# Altium PCB ProPrj_HTXStudio_OneHanded_Keyboard.PcbDoc (part 3 of 11)
Units mm, origin at the board's own origin, x right, y up, seen from the top; angles counter-clockwise.
Board outline 152.4 x 101.6 mm, 20 copper layers (F.Cu, F.Mask, B.Cu, B.Mask, In1.Cu, F.SilkS, In2.Cu, B.SilkS, F.Adhes, B.Adhes, F.Paste, B.Paste, Dwgs.User, Cmts.User, Eco1.User, Eco2.User, Edge.Cuts, Margin, B.CrtYd, F.CrtYd); 269 components, 0 nets, 747 pads, 1168 vias.
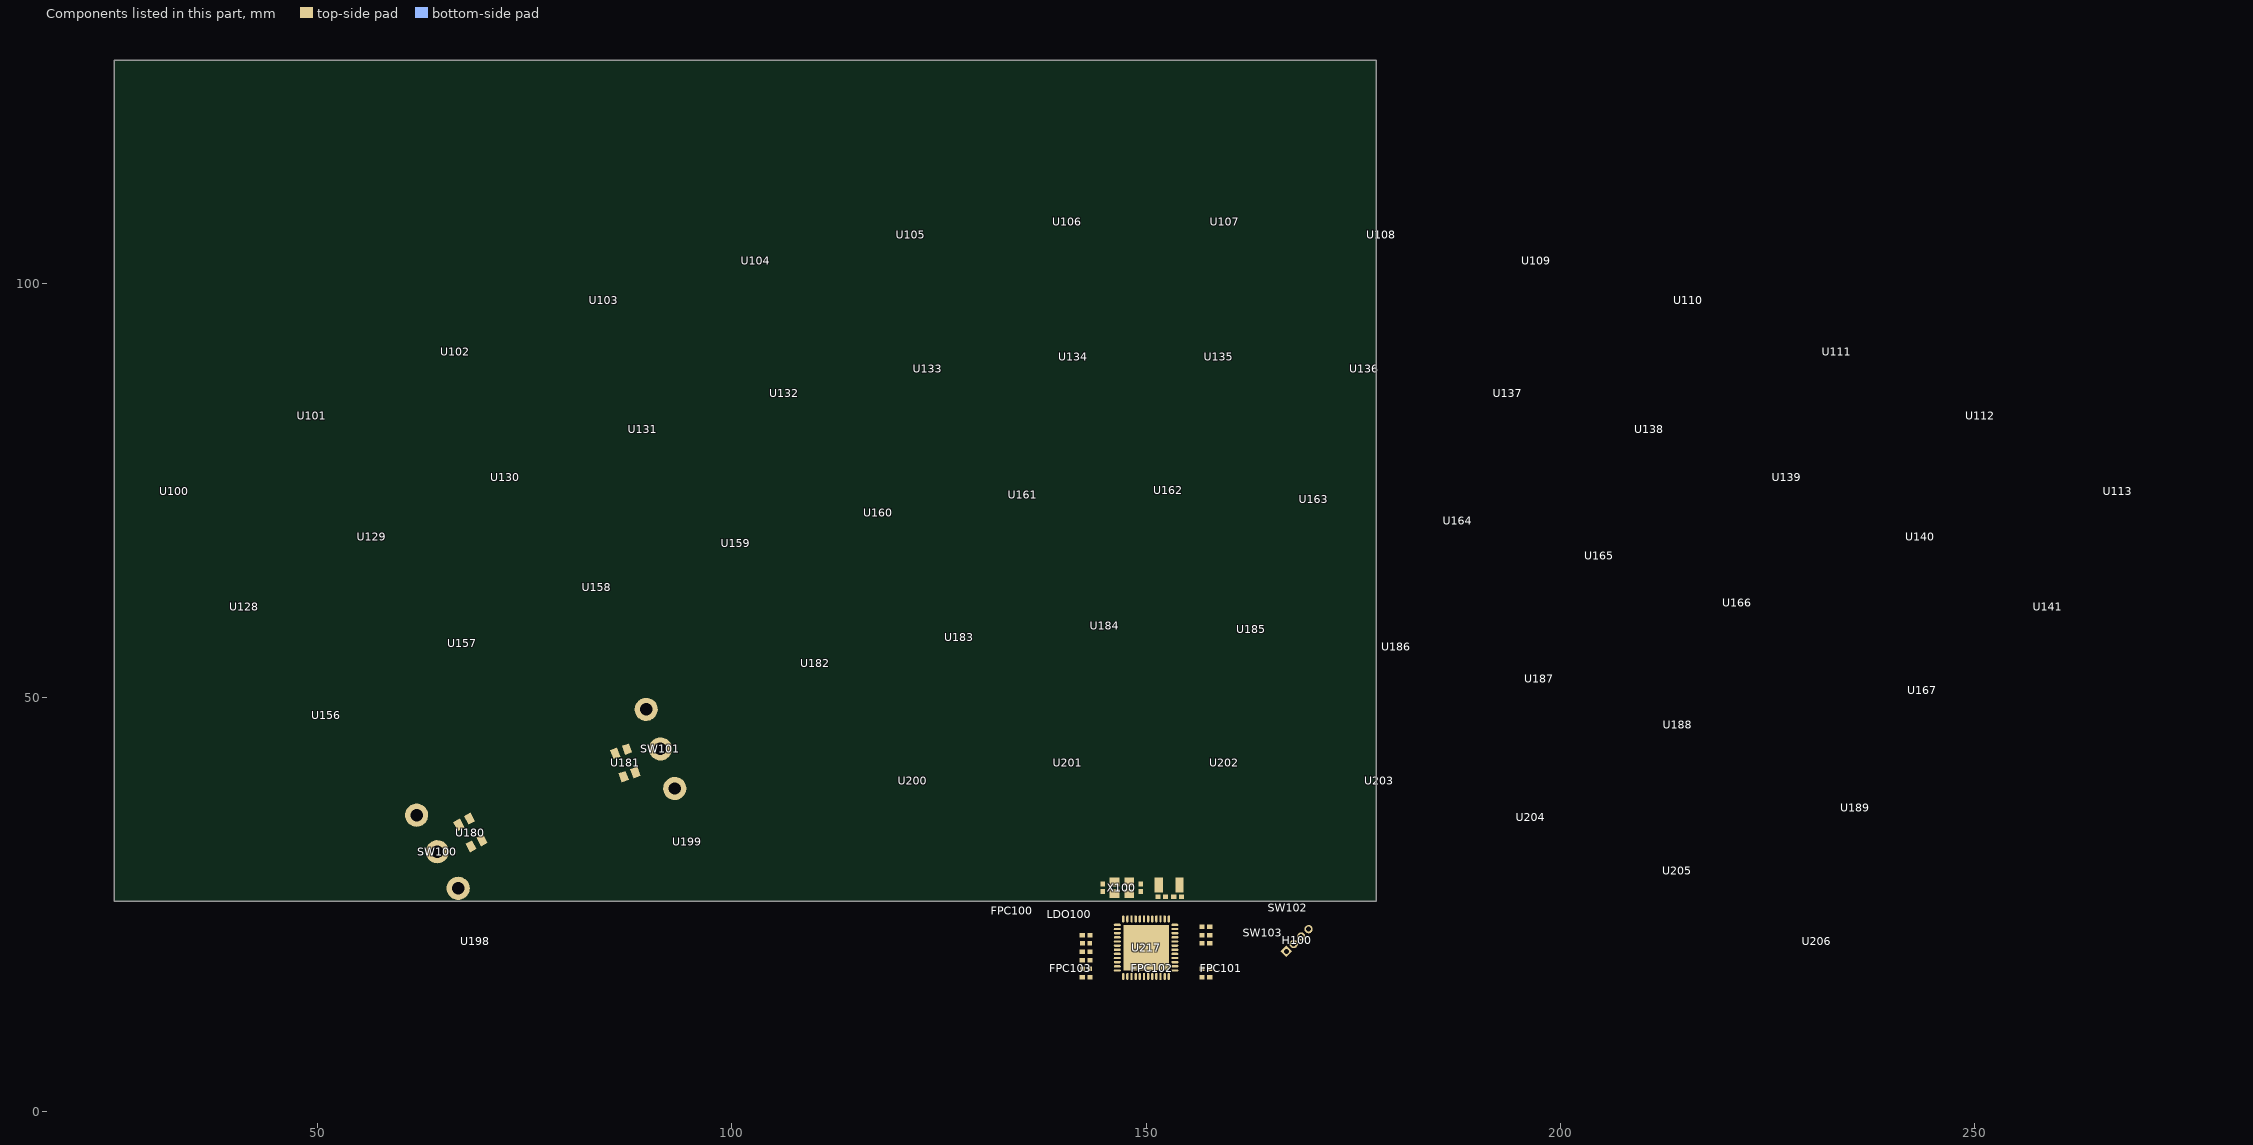
[diagram p15: the components of this part, seen from the top]

## Design rules (kind name [scope] priority, off if disabled: settings) (continued)
PolygonConnect Polygon_B.Cu--226_ConnectRelief90 [IsNamedPolygon('B.Cu--226') vs (IsThruPin or IsSMTPin) and (PadShape_AllLayers <> 'Round')] p396: connectstyle=Relief reliefconductorwidth=0.254 reliefentries=4 polygonreliefangle="90 Angle" airgapwidth=0.254
PolygonConnect Polygon_B.Cu--225_ConnectDirect [IsNamedPolygon('B.Cu--225') vs IsVia] p397: connectstyle=Direct reliefconductorwidth=0.254 reliefentries=4 polygonreliefangle="90 Angle" airgapwidth=0.254
PolygonConnect Polygon_B.Cu--225_ConnectRelief45 [IsNamedPolygon('B.Cu--225') vs (IsThruPin or IsSMTPin) and (PadShape_AllLayers = 'Round')] p398: connectstyle=Relief reliefconductorwidth=0.254 reliefentries=4 polygonreliefangle="45 Angle" airgapwidth=0.254
PolygonConnect Polygon_B.Cu--225_ConnectRelief90 [IsNamedPolygon('B.Cu--225') vs (IsThruPin or IsSMTPin) and (PadShape_AllLayers <> 'Round')] p399: connectstyle=Relief reliefconductorwidth=0.254 reliefentries=4 polygonreliefangle="90 Angle" airgapwidth=0.254
PolygonConnect Polygon_B.Cu--224_ConnectDirect [IsNamedPolygon('B.Cu--224') vs IsVia] p400: connectstyle=Direct reliefconductorwidth=0.254 reliefentries=4 polygonreliefangle="90 Angle" airgapwidth=0.254
PolygonConnect Polygon_B.Cu--224_ConnectRelief45 [IsNamedPolygon('B.Cu--224') vs (IsThruPin or IsSMTPin) and (PadShape_AllLayers = 'Round')] p401: connectstyle=Relief reliefconductorwidth=0.254 reliefentries=4 polygonreliefangle="45 Angle" airgapwidth=0.254
PolygonConnect Polygon_B.Cu--224_ConnectRelief90 [IsNamedPolygon('B.Cu--224') vs (IsThruPin or IsSMTPin) and (PadShape_AllLayers <> 'Round')] p402: connectstyle=Relief reliefconductorwidth=0.254 reliefentries=4 polygonreliefangle="90 Angle" airgapwidth=0.254
PolygonConnect Polygon_B.Cu--223_ConnectDirect [IsNamedPolygon('B.Cu--223') vs IsVia] p403: connectstyle=Direct reliefconductorwidth=0.254 reliefentries=4 polygonreliefangle="90 Angle" airgapwidth=0.254
PolygonConnect Polygon_B.Cu--223_ConnectRelief45 [IsNamedPolygon('B.Cu--223') vs (IsThruPin or IsSMTPin) and (PadShape_AllLayers = 'Round')] p404: connectstyle=Relief reliefconductorwidth=0.254 reliefentries=4 polygonreliefangle="45 Angle" airgapwidth=0.254
PolygonConnect Polygon_B.Cu--223_ConnectRelief90 [IsNamedPolygon('B.Cu--223') vs (IsThruPin or IsSMTPin) and (PadShape_AllLayers <> 'Round')] p405: connectstyle=Relief reliefconductorwidth=0.254 reliefentries=4 polygonreliefangle="90 Angle" airgapwidth=0.254
PolygonConnect Polygon_B.Cu--222_ConnectDirect [IsNamedPolygon('B.Cu--222') vs IsVia] p406: connectstyle=Direct reliefconductorwidth=0.254 reliefentries=4 polygonreliefangle="90 Angle" airgapwidth=0.254
PolygonConnect Polygon_B.Cu--222_ConnectRelief45 [IsNamedPolygon('B.Cu--222') vs (IsThruPin or IsSMTPin) and (PadShape_AllLayers = 'Round')] p407: connectstyle=Relief reliefconductorwidth=0.254 reliefentries=4 polygonreliefangle="45 Angle" airgapwidth=0.254
PolygonConnect Polygon_B.Cu--222_ConnectRelief90 [IsNamedPolygon('B.Cu--222') vs (IsThruPin or IsSMTPin) and (PadShape_AllLayers <> 'Round')] p408: connectstyle=Relief reliefconductorwidth=0.254 reliefentries=4 polygonreliefangle="90 Angle" airgapwidth=0.254
PolygonConnect Polygon_B.Cu--221_ConnectDirect [IsNamedPolygon('B.Cu--221') vs IsVia] p409: connectstyle=Direct reliefconductorwidth=0.254 reliefentries=4 polygonreliefangle="90 Angle" airgapwidth=0.254
PolygonConnect Polygon_B.Cu--221_ConnectRelief45 [IsNamedPolygon('B.Cu--221') vs (IsThruPin or IsSMTPin) and (PadShape_AllLayers = 'Round')] p410: connectstyle=Relief reliefconductorwidth=0.254 reliefentries=4 polygonreliefangle="45 Angle" airgapwidth=0.254
PolygonConnect Polygon_B.Cu--221_ConnectRelief90 [IsNamedPolygon('B.Cu--221') vs (IsThruPin or IsSMTPin) and (PadShape_AllLayers <> 'Round')] p411: connectstyle=Relief reliefconductorwidth=0.254 reliefentries=4 polygonreliefangle="90 Angle" airgapwidth=0.254
PolygonConnect Polygon_B.Cu--220_ConnectDirect [IsNamedPolygon('B.Cu--220') vs IsVia] p412: connectstyle=Direct reliefconductorwidth=0.254 reliefentries=4 polygonreliefangle="90 Angle" airgapwidth=0.254
PolygonConnect Polygon_B.Cu--220_ConnectRelief45 [IsNamedPolygon('B.Cu--220') vs (IsThruPin or IsSMTPin) and (PadShape_AllLayers = 'Round')] p413: connectstyle=Relief reliefconductorwidth=0.254 reliefentries=4 polygonreliefangle="45 Angle" airgapwidth=0.254
PolygonConnect Polygon_B.Cu--220_ConnectRelief90 [IsNamedPolygon('B.Cu--220') vs (IsThruPin or IsSMTPin) and (PadShape_AllLayers <> 'Round')] p414: connectstyle=Relief reliefconductorwidth=0.254 reliefentries=4 polygonreliefangle="90 Angle" airgapwidth=0.254
PolygonConnect Polygon_B.Cu--219_ConnectDirect [IsNamedPolygon('B.Cu--219') vs IsVia] p415: connectstyle=Direct reliefconductorwidth=0.254 reliefentries=4 polygonreliefangle="90 Angle" airgapwidth=0.254
PolygonConnect Polygon_B.Cu--219_ConnectRelief45 [IsNamedPolygon('B.Cu--219') vs (IsThruPin or IsSMTPin) and (PadShape_AllLayers = 'Round')] p416: connectstyle=Relief reliefconductorwidth=0.254 reliefentries=4 polygonreliefangle="45 Angle" airgapwidth=0.254
PolygonConnect Polygon_B.Cu--219_ConnectRelief90 [IsNamedPolygon('B.Cu--219') vs (IsThruPin or IsSMTPin) and (PadShape_AllLayers <> 'Round')] p417: connectstyle=Relief reliefconductorwidth=0.254 reliefentries=4 polygonreliefangle="90 Angle" airgapwidth=0.254
PolygonConnect Polygon_B.Cu--218_ConnectDirect [IsNamedPolygon('B.Cu--218') vs IsVia] p418: connectstyle=Direct reliefconductorwidth=0.254 reliefentries=4 polygonreliefangle="90 Angle" airgapwidth=0.254
PolygonConnect Polygon_B.Cu--218_ConnectRelief45 [IsNamedPolygon('B.Cu--218') vs (IsThruPin or IsSMTPin) and (PadShape_AllLayers = 'Round')] p419: connectstyle=Relief reliefconductorwidth=0.254 reliefentries=4 polygonreliefangle="45 Angle" airgapwidth=0.254
PolygonConnect Polygon_B.Cu--218_ConnectRelief90 [IsNamedPolygon('B.Cu--218') vs (IsThruPin or IsSMTPin) and (PadShape_AllLayers <> 'Round')] p420: connectstyle=Relief reliefconductorwidth=0.254 reliefentries=4 polygonreliefangle="90 Angle" airgapwidth=0.254
PolygonConnect Polygon_B.Cu--217_ConnectDirect [IsNamedPolygon('B.Cu--217') vs IsVia] p421: connectstyle=Direct reliefconductorwidth=0.254 reliefentries=4 polygonreliefangle="90 Angle" airgapwidth=0.254
PolygonConnect Polygon_B.Cu--217_ConnectRelief45 [IsNamedPolygon('B.Cu--217') vs (IsThruPin or IsSMTPin) and (PadShape_AllLayers = 'Round')] p422: connectstyle=Relief reliefconductorwidth=0.254 reliefentries=4 polygonreliefangle="45 Angle" airgapwidth=0.254
PolygonConnect Polygon_B.Cu--217_ConnectRelief90 [IsNamedPolygon('B.Cu--217') vs (IsThruPin or IsSMTPin) and (PadShape_AllLayers <> 'Round')] p423: connectstyle=Relief reliefconductorwidth=0.254 reliefentries=4 polygonreliefangle="90 Angle" airgapwidth=0.254
PolygonConnect Polygon_B.Cu--216_ConnectDirect [IsNamedPolygon('B.Cu--216') vs IsVia] p424: connectstyle=Direct reliefconductorwidth=0.254 reliefentries=4 polygonreliefangle="90 Angle" airgapwidth=0.254
PolygonConnect Polygon_B.Cu--216_ConnectRelief45 [IsNamedPolygon('B.Cu--216') vs (IsThruPin or IsSMTPin) and (PadShape_AllLayers = 'Round')] p425: connectstyle=Relief reliefconductorwidth=0.254 reliefentries=4 polygonreliefangle="45 Angle" airgapwidth=0.254
PolygonConnect Polygon_B.Cu--216_ConnectRelief90 [IsNamedPolygon('B.Cu--216') vs (IsThruPin or IsSMTPin) and (PadShape_AllLayers <> 'Round')] p426: connectstyle=Relief reliefconductorwidth=0.254 reliefentries=4 polygonreliefangle="90 Angle" airgapwidth=0.254
PolygonConnect Polygon_B.Cu--215_ConnectDirect [IsNamedPolygon('B.Cu--215') vs IsVia] p427: connectstyle=Direct reliefconductorwidth=0.254 reliefentries=4 polygonreliefangle="90 Angle" airgapwidth=0.254
PolygonConnect Polygon_B.Cu--215_ConnectRelief45 [IsNamedPolygon('B.Cu--215') vs (IsThruPin or IsSMTPin) and (PadShape_AllLayers = 'Round')] p428: connectstyle=Relief reliefconductorwidth=0.254 reliefentries=4 polygonreliefangle="45 Angle" airgapwidth=0.254
PolygonConnect Polygon_B.Cu--215_ConnectRelief90 [IsNamedPolygon('B.Cu--215') vs (IsThruPin or IsSMTPin) and (PadShape_AllLayers <> 'Round')] p429: connectstyle=Relief reliefconductorwidth=0.254 reliefentries=4 polygonreliefangle="90 Angle" airgapwidth=0.254
PolygonConnect Polygon_B.Cu--214_ConnectDirect [IsNamedPolygon('B.Cu--214') vs IsVia] p430: connectstyle=Direct reliefconductorwidth=0.254 reliefentries=4 polygonreliefangle="90 Angle" airgapwidth=0.254
PolygonConnect Polygon_B.Cu--214_ConnectRelief45 [IsNamedPolygon('B.Cu--214') vs (IsThruPin or IsSMTPin) and (PadShape_AllLayers = 'Round')] p431: connectstyle=Relief reliefconductorwidth=0.254 reliefentries=4 polygonreliefangle="45 Angle" airgapwidth=0.254
PolygonConnect Polygon_B.Cu--214_ConnectRelief90 [IsNamedPolygon('B.Cu--214') vs (IsThruPin or IsSMTPin) and (PadShape_AllLayers <> 'Round')] p432: connectstyle=Relief reliefconductorwidth=0.254 reliefentries=4 polygonreliefangle="90 Angle" airgapwidth=0.254
PolygonConnect Polygon_B.Cu--213_ConnectDirect [IsNamedPolygon('B.Cu--213') vs IsVia] p433: connectstyle=Direct reliefconductorwidth=0.254 reliefentries=4 polygonreliefangle="90 Angle" airgapwidth=0.254
PolygonConnect Polygon_B.Cu--213_ConnectRelief45 [IsNamedPolygon('B.Cu--213') vs (IsThruPin or IsSMTPin) and (PadShape_AllLayers = 'Round')] p434: connectstyle=Relief reliefconductorwidth=0.254 reliefentries=4 polygonreliefangle="45 Angle" airgapwidth=0.254
PolygonConnect Polygon_B.Cu--213_ConnectRelief90 [IsNamedPolygon('B.Cu--213') vs (IsThruPin or IsSMTPin) and (PadShape_AllLayers <> 'Round')] p435: connectstyle=Relief reliefconductorwidth=0.254 reliefentries=4 polygonreliefangle="90 Angle" airgapwidth=0.254
PolygonConnect Polygon_B.Cu--212_ConnectDirect [IsNamedPolygon('B.Cu--212') vs IsVia] p436: connectstyle=Direct reliefconductorwidth=0.254 reliefentries=4 polygonreliefangle="90 Angle" airgapwidth=0.254
PolygonConnect Polygon_B.Cu--212_ConnectRelief45 [IsNamedPolygon('B.Cu--212') vs (IsThruPin or IsSMTPin) and (PadShape_AllLayers = 'Round')] p437: connectstyle=Relief reliefconductorwidth=0.254 reliefentries=4 polygonreliefangle="45 Angle" airgapwidth=0.254
PolygonConnect Polygon_B.Cu--212_ConnectRelief90 [IsNamedPolygon('B.Cu--212') vs (IsThruPin or IsSMTPin) and (PadShape_AllLayers <> 'Round')] p438: connectstyle=Relief reliefconductorwidth=0.254 reliefentries=4 polygonreliefangle="90 Angle" airgapwidth=0.254
PolygonConnect Polygon_B.Cu--211_ConnectDirect [IsNamedPolygon('B.Cu--211') vs IsVia] p439: connectstyle=Direct reliefconductorwidth=0.254 reliefentries=4 polygonreliefangle="90 Angle" airgapwidth=0.254
PolygonConnect Polygon_B.Cu--211_ConnectRelief45 [IsNamedPolygon('B.Cu--211') vs (IsThruPin or IsSMTPin) and (PadShape_AllLayers = 'Round')] p440: connectstyle=Relief reliefconductorwidth=0.254 reliefentries=4 polygonreliefangle="45 Angle" airgapwidth=0.254
PolygonConnect Polygon_B.Cu--211_ConnectRelief90 [IsNamedPolygon('B.Cu--211') vs (IsThruPin or IsSMTPin) and (PadShape_AllLayers <> 'Round')] p441: connectstyle=Relief reliefconductorwidth=0.254 reliefentries=4 polygonreliefangle="90 Angle" airgapwidth=0.254
PolygonConnect Polygon_B.Cu--210_ConnectDirect [IsNamedPolygon('B.Cu--210') vs IsVia] p442: connectstyle=Direct reliefconductorwidth=0.254 reliefentries=4 polygonreliefangle="90 Angle" airgapwidth=0.254
PolygonConnect Polygon_B.Cu--210_ConnectRelief45 [IsNamedPolygon('B.Cu--210') vs (IsThruPin or IsSMTPin) and (PadShape_AllLayers = 'Round')] p443: connectstyle=Relief reliefconductorwidth=0.254 reliefentries=4 polygonreliefangle="45 Angle" airgapwidth=0.254
PolygonConnect Polygon_B.Cu--210_ConnectRelief90 [IsNamedPolygon('B.Cu--210') vs (IsThruPin or IsSMTPin) and (PadShape_AllLayers <> 'Round')] p444: connectstyle=Relief reliefconductorwidth=0.254 reliefentries=4 polygonreliefangle="90 Angle" airgapwidth=0.254
PolygonConnect Polygon_B.Cu--209_ConnectDirect [IsNamedPolygon('B.Cu--209') vs IsVia] p445: connectstyle=Direct reliefconductorwidth=0.254 reliefentries=4 polygonreliefangle="90 Angle" airgapwidth=0.254
PolygonConnect Polygon_B.Cu--209_ConnectRelief45 [IsNamedPolygon('B.Cu--209') vs (IsThruPin or IsSMTPin) and (PadShape_AllLayers = 'Round')] p446: connectstyle=Relief reliefconductorwidth=0.254 reliefentries=4 polygonreliefangle="45 Angle" airgapwidth=0.254
PolygonConnect Polygon_B.Cu--209_ConnectRelief90 [IsNamedPolygon('B.Cu--209') vs (IsThruPin or IsSMTPin) and (PadShape_AllLayers <> 'Round')] p447: connectstyle=Relief reliefconductorwidth=0.254 reliefentries=4 polygonreliefangle="90 Angle" airgapwidth=0.254
PolygonConnect Polygon_B.Cu--208_ConnectDirect [IsNamedPolygon('B.Cu--208') vs IsVia] p448: connectstyle=Direct reliefconductorwidth=0.254 reliefentries=4 polygonreliefangle="90 Angle" airgapwidth=0.254
PolygonConnect Polygon_B.Cu--208_ConnectRelief45 [IsNamedPolygon('B.Cu--208') vs (IsThruPin or IsSMTPin) and (PadShape_AllLayers = 'Round')] p449: connectstyle=Relief reliefconductorwidth=0.254 reliefentries=4 polygonreliefangle="45 Angle" airgapwidth=0.254
PolygonConnect Polygon_B.Cu--208_ConnectRelief90 [IsNamedPolygon('B.Cu--208') vs (IsThruPin or IsSMTPin) and (PadShape_AllLayers <> 'Round')] p450: connectstyle=Relief reliefconductorwidth=0.254 reliefentries=4 polygonreliefangle="90 Angle" airgapwidth=0.254
PolygonConnect Polygon_B.Cu--207_ConnectDirect [IsNamedPolygon('B.Cu--207') vs IsVia] p451: connectstyle=Direct reliefconductorwidth=0.254 reliefentries=4 polygonreliefangle="90 Angle" airgapwidth=0.254
PolygonConnect Polygon_B.Cu--207_ConnectRelief45 [IsNamedPolygon('B.Cu--207') vs (IsThruPin or IsSMTPin) and (PadShape_AllLayers = 'Round')] p452: connectstyle=Relief reliefconductorwidth=0.254 reliefentries=4 polygonreliefangle="45 Angle" airgapwidth=0.254
PolygonConnect Polygon_B.Cu--207_ConnectRelief90 [IsNamedPolygon('B.Cu--207') vs (IsThruPin or IsSMTPin) and (PadShape_AllLayers <> 'Round')] p453: connectstyle=Relief reliefconductorwidth=0.254 reliefentries=4 polygonreliefangle="90 Angle" airgapwidth=0.254
PolygonConnect Polygon_B.Cu--206_ConnectDirect [IsNamedPolygon('B.Cu--206') vs IsVia] p454: connectstyle=Direct reliefconductorwidth=0.254 reliefentries=4 polygonreliefangle="90 Angle" airgapwidth=0.254
PolygonConnect Polygon_B.Cu--206_ConnectRelief45 [IsNamedPolygon('B.Cu--206') vs (IsThruPin or IsSMTPin) and (PadShape_AllLayers = 'Round')] p455: connectstyle=Relief reliefconductorwidth=0.254 reliefentries=4 polygonreliefangle="45 Angle" airgapwidth=0.254
PolygonConnect Polygon_B.Cu--206_ConnectRelief90 [IsNamedPolygon('B.Cu--206') vs (IsThruPin or IsSMTPin) and (PadShape_AllLayers <> 'Round')] p456: connectstyle=Relief reliefconductorwidth=0.254 reliefentries=4 polygonreliefangle="90 Angle" airgapwidth=0.254
PolygonConnect Polygon_B.Cu--205_ConnectDirect [IsNamedPolygon('B.Cu--205') vs IsVia] p457: connectstyle=Direct reliefconductorwidth=0.254 reliefentries=4 polygonreliefangle="90 Angle" airgapwidth=0.254
PolygonConnect Polygon_B.Cu--205_ConnectRelief45 [IsNamedPolygon('B.Cu--205') vs (IsThruPin or IsSMTPin) and (PadShape_AllLayers = 'Round')] p458: connectstyle=Relief reliefconductorwidth=0.254 reliefentries=4 polygonreliefangle="45 Angle" airgapwidth=0.254
PolygonConnect Polygon_B.Cu--205_ConnectRelief90 [IsNamedPolygon('B.Cu--205') vs (IsThruPin or IsSMTPin) and (PadShape_AllLayers <> 'Round')] p459: connectstyle=Relief reliefconductorwidth=0.254 reliefentries=4 polygonreliefangle="90 Angle" airgapwidth=0.254
PolygonConnect Polygon_B.Cu--204_ConnectDirect [IsNamedPolygon('B.Cu--204') vs IsVia] p460: connectstyle=Direct reliefconductorwidth=0.254 reliefentries=4 polygonreliefangle="90 Angle" airgapwidth=0.254
PolygonConnect Polygon_B.Cu--204_ConnectRelief45 [IsNamedPolygon('B.Cu--204') vs (IsThruPin or IsSMTPin) and (PadShape_AllLayers = 'Round')] p461: connectstyle=Relief reliefconductorwidth=0.254 reliefentries=4 polygonreliefangle="45 Angle" airgapwidth=0.254
PolygonConnect Polygon_B.Cu--204_ConnectRelief90 [IsNamedPolygon('B.Cu--204') vs (IsThruPin or IsSMTPin) and (PadShape_AllLayers <> 'Round')] p462: connectstyle=Relief reliefconductorwidth=0.254 reliefentries=4 polygonreliefangle="90 Angle" airgapwidth=0.254
PolygonConnect Polygon_B.Cu--203_ConnectDirect [IsNamedPolygon('B.Cu--203') vs IsVia] p463: connectstyle=Direct reliefconductorwidth=0.254 reliefentries=4 polygonreliefangle="90 Angle" airgapwidth=0.254
PolygonConnect Polygon_B.Cu--203_ConnectRelief45 [IsNamedPolygon('B.Cu--203') vs (IsThruPin or IsSMTPin) and (PadShape_AllLayers = 'Round')] p464: connectstyle=Relief reliefconductorwidth=0.254 reliefentries=4 polygonreliefangle="45 Angle" airgapwidth=0.254
PolygonConnect Polygon_B.Cu--203_ConnectRelief90 [IsNamedPolygon('B.Cu--203') vs (IsThruPin or IsSMTPin) and (PadShape_AllLayers <> 'Round')] p465: connectstyle=Relief reliefconductorwidth=0.254 reliefentries=4 polygonreliefangle="90 Angle" airgapwidth=0.254
PolygonConnect Polygon_B.Cu--202_ConnectDirect [IsNamedPolygon('B.Cu--202') vs IsVia] p466: connectstyle=Direct reliefconductorwidth=0.254 reliefentries=4 polygonreliefangle="90 Angle" airgapwidth=0.254
PolygonConnect Polygon_B.Cu--202_ConnectRelief45 [IsNamedPolygon('B.Cu--202') vs (IsThruPin or IsSMTPin) and (PadShape_AllLayers = 'Round')] p467: connectstyle=Relief reliefconductorwidth=0.254 reliefentries=4 polygonreliefangle="45 Angle" airgapwidth=0.254
PolygonConnect Polygon_B.Cu--202_ConnectRelief90 [IsNamedPolygon('B.Cu--202') vs (IsThruPin or IsSMTPin) and (PadShape_AllLayers <> 'Round')] p468: connectstyle=Relief reliefconductorwidth=0.254 reliefentries=4 polygonreliefangle="90 Angle" airgapwidth=0.254
PolygonConnect Polygon_B.Cu--201_ConnectDirect [IsNamedPolygon('B.Cu--201') vs IsVia] p469: connectstyle=Direct reliefconductorwidth=0.254 reliefentries=4 polygonreliefangle="90 Angle" airgapwidth=0.254
PolygonConnect Polygon_B.Cu--201_ConnectRelief45 [IsNamedPolygon('B.Cu--201') vs (IsThruPin or IsSMTPin) and (PadShape_AllLayers = 'Round')] p470: connectstyle=Relief reliefconductorwidth=0.254 reliefentries=4 polygonreliefangle="45 Angle" airgapwidth=0.254
PolygonConnect Polygon_B.Cu--201_ConnectRelief90 [IsNamedPolygon('B.Cu--201') vs (IsThruPin or IsSMTPin) and (PadShape_AllLayers <> 'Round')] p471: connectstyle=Relief reliefconductorwidth=0.254 reliefentries=4 polygonreliefangle="90 Angle" airgapwidth=0.254
PolygonConnect Polygon_B.Cu--200_ConnectDirect [IsNamedPolygon('B.Cu--200') vs IsVia] p472: connectstyle=Direct reliefconductorwidth=0.254 reliefentries=4 polygonreliefangle="90 Angle" airgapwidth=0.254
PolygonConnect Polygon_B.Cu--200_ConnectRelief45 [IsNamedPolygon('B.Cu--200') vs (IsThruPin or IsSMTPin) and (PadShape_AllLayers = 'Round')] p473: connectstyle=Relief reliefconductorwidth=0.254 reliefentries=4 polygonreliefangle="45 Angle" airgapwidth=0.254
PolygonConnect Polygon_B.Cu--200_ConnectRelief90 [IsNamedPolygon('B.Cu--200') vs (IsThruPin or IsSMTPin) and (PadShape_AllLayers <> 'Round')] p474: connectstyle=Relief reliefconductorwidth=0.254 reliefentries=4 polygonreliefangle="90 Angle" airgapwidth=0.254
PolygonConnect Polygon_B.Cu--199_ConnectDirect [IsNamedPolygon('B.Cu--199') vs IsVia] p475: connectstyle=Direct reliefconductorwidth=0.254 reliefentries=4 polygonreliefangle="90 Angle" airgapwidth=0.254
PolygonConnect Polygon_B.Cu--199_ConnectRelief45 [IsNamedPolygon('B.Cu--199') vs (IsThruPin or IsSMTPin) and (PadShape_AllLayers = 'Round')] p476: connectstyle=Relief reliefconductorwidth=0.254 reliefentries=4 polygonreliefangle="45 Angle" airgapwidth=0.254
PolygonConnect Polygon_B.Cu--199_ConnectRelief90 [IsNamedPolygon('B.Cu--199') vs (IsThruPin or IsSMTPin) and (PadShape_AllLayers <> 'Round')] p477: connectstyle=Relief reliefconductorwidth=0.254 reliefentries=4 polygonreliefangle="90 Angle" airgapwidth=0.254
PolygonConnect Polygon_B.Cu--198_ConnectDirect [IsNamedPolygon('B.Cu--198') vs IsVia] p478: connectstyle=Direct reliefconductorwidth=0.254 reliefentries=4 polygonreliefangle="90 Angle" airgapwidth=0.254
PolygonConnect Polygon_B.Cu--198_ConnectRelief45 [IsNamedPolygon('B.Cu--198') vs (IsThruPin or IsSMTPin) and (PadShape_AllLayers = 'Round')] p479: connectstyle=Relief reliefconductorwidth=0.254 reliefentries=4 polygonreliefangle="45 Angle" airgapwidth=0.254
PolygonConnect Polygon_B.Cu--198_ConnectRelief90 [IsNamedPolygon('B.Cu--198') vs (IsThruPin or IsSMTPin) and (PadShape_AllLayers <> 'Round')] p480: connectstyle=Relief reliefconductorwidth=0.254 reliefentries=4 polygonreliefangle="90 Angle" airgapwidth=0.254
PolygonConnect Polygon_B.Cu--197_ConnectDirect [IsNamedPolygon('B.Cu--197') vs IsVia] p481: connectstyle=Direct reliefconductorwidth=0.254 reliefentries=4 polygonreliefangle="90 Angle" airgapwidth=0.254
PolygonConnect Polygon_B.Cu--197_ConnectRelief45 [IsNamedPolygon('B.Cu--197') vs (IsThruPin or IsSMTPin) and (PadShape_AllLayers = 'Round')] p482: connectstyle=Relief reliefconductorwidth=0.254 reliefentries=4 polygonreliefangle="45 Angle" airgapwidth=0.254
PolygonConnect Polygon_B.Cu--197_ConnectRelief90 [IsNamedPolygon('B.Cu--197') vs (IsThruPin or IsSMTPin) and (PadShape_AllLayers <> 'Round')] p483: connectstyle=Relief reliefconductorwidth=0.254 reliefentries=4 polygonreliefangle="90 Angle" airgapwidth=0.254
PolygonConnect Polygon_B.Cu--196_ConnectDirect [IsNamedPolygon('B.Cu--196') vs IsVia] p484: connectstyle=Direct reliefconductorwidth=0.254 reliefentries=4 polygonreliefangle="90 Angle" airgapwidth=0.254
PolygonConnect Polygon_B.Cu--196_ConnectRelief45 [IsNamedPolygon('B.Cu--196') vs (IsThruPin or IsSMTPin) and (PadShape_AllLayers = 'Round')] p485: connectstyle=Relief reliefconductorwidth=0.254 reliefentries=4 polygonreliefangle="45 Angle" airgapwidth=0.254
PolygonConnect Polygon_B.Cu--196_ConnectRelief90 [IsNamedPolygon('B.Cu--196') vs (IsThruPin or IsSMTPin) and (PadShape_AllLayers <> 'Round')] p486: connectstyle=Relief reliefconductorwidth=0.254 reliefentries=4 polygonreliefangle="90 Angle" airgapwidth=0.254
PolygonConnect Polygon_B.Cu--195_ConnectDirect [IsNamedPolygon('B.Cu--195') vs IsVia] p487: connectstyle=Direct reliefconductorwidth=0.254 reliefentries=4 polygonreliefangle="90 Angle" airgapwidth=0.254
PolygonConnect Polygon_B.Cu--195_ConnectRelief45 [IsNamedPolygon('B.Cu--195') vs (IsThruPin or IsSMTPin) and (PadShape_AllLayers = 'Round')] p488: connectstyle=Relief reliefconductorwidth=0.254 reliefentries=4 polygonreliefangle="45 Angle" airgapwidth=0.254
PolygonConnect Polygon_B.Cu--195_ConnectRelief90 [IsNamedPolygon('B.Cu--195') vs (IsThruPin or IsSMTPin) and (PadShape_AllLayers <> 'Round')] p489: connectstyle=Relief reliefconductorwidth=0.254 reliefentries=4 polygonreliefangle="90 Angle" airgapwidth=0.254
PolygonConnect Polygon_B.Cu--194_ConnectDirect [IsNamedPolygon('B.Cu--194') vs IsVia] p490: connectstyle=Direct reliefconductorwidth=0.254 reliefentries=4 polygonreliefangle="90 Angle" airgapwidth=0.254
PolygonConnect Polygon_B.Cu--194_ConnectRelief45 [IsNamedPolygon('B.Cu--194') vs (IsThruPin or IsSMTPin) and (PadShape_AllLayers = 'Round')] p491: connectstyle=Relief reliefconductorwidth=0.254 reliefentries=4 polygonreliefangle="45 Angle" airgapwidth=0.254
PolygonConnect Polygon_B.Cu--194_ConnectRelief90 [IsNamedPolygon('B.Cu--194') vs (IsThruPin or IsSMTPin) and (PadShape_AllLayers <> 'Round')] p492: connectstyle=Relief reliefconductorwidth=0.254 reliefentries=4 polygonreliefangle="90 Angle" airgapwidth=0.254
PolygonConnect Polygon_B.Cu--193_ConnectDirect [IsNamedPolygon('B.Cu--193') vs IsVia] p493: connectstyle=Direct reliefconductorwidth=0.254 reliefentries=4 polygonreliefangle="90 Angle" airgapwidth=0.254
PolygonConnect Polygon_B.Cu--193_ConnectRelief45 [IsNamedPolygon('B.Cu--193') vs (IsThruPin or IsSMTPin) and (PadShape_AllLayers = 'Round')] p494: connectstyle=Relief reliefconductorwidth=0.254 reliefentries=4 polygonreliefangle="45 Angle" airgapwidth=0.254
PolygonConnect Polygon_B.Cu--193_ConnectRelief90 [IsNamedPolygon('B.Cu--193') vs (IsThruPin or IsSMTPin) and (PadShape_AllLayers <> 'Round')] p495: connectstyle=Relief reliefconductorwidth=0.254 reliefentries=4 polygonreliefangle="90 Angle" airgapwidth=0.254
PolygonConnect Polygon_B.Cu--192_ConnectDirect [IsNamedPolygon('B.Cu--192') vs IsVia] p496: connectstyle=Direct reliefconductorwidth=0.254 reliefentries=4 polygonreliefangle="90 Angle" airgapwidth=0.254
PolygonConnect Polygon_B.Cu--192_ConnectRelief45 [IsNamedPolygon('B.Cu--192') vs (IsThruPin or IsSMTPin) and (PadShape_AllLayers = 'Round')] p497: connectstyle=Relief reliefconductorwidth=0.254 reliefentries=4 polygonreliefangle="45 Angle" airgapwidth=0.254
PolygonConnect Polygon_B.Cu--192_ConnectRelief90 [IsNamedPolygon('B.Cu--192') vs (IsThruPin or IsSMTPin) and (PadShape_AllLayers <> 'Round')] p498: connectstyle=Relief reliefconductorwidth=0.254 reliefentries=4 polygonreliefangle="90 Angle" airgapwidth=0.254
PolygonConnect Polygon_B.Cu--191_ConnectDirect [IsNamedPolygon('B.Cu--191') vs IsVia] p499: connectstyle=Direct reliefconductorwidth=0.254 reliefentries=4 polygonreliefangle="90 Angle" airgapwidth=0.254
PolygonConnect Polygon_B.Cu--191_ConnectRelief45 [IsNamedPolygon('B.Cu--191') vs (IsThruPin or IsSMTPin) and (PadShape_AllLayers = 'Round')] p500: connectstyle=Relief reliefconductorwidth=0.254 reliefentries=4 polygonreliefangle="45 Angle" airgapwidth=0.254
PolygonConnect Polygon_B.Cu--191_ConnectRelief90 [IsNamedPolygon('B.Cu--191') vs (IsThruPin or IsSMTPin) and (PadShape_AllLayers <> 'Round')] p501: connectstyle=Relief reliefconductorwidth=0.254 reliefentries=4 polygonreliefangle="90 Angle" airgapwidth=0.254
PolygonConnect Polygon_B.Cu--190_ConnectDirect [IsNamedPolygon('B.Cu--190') vs IsVia] p502: connectstyle=Direct reliefconductorwidth=0.254 reliefentries=4 polygonreliefangle="90 Angle" airgapwidth=0.254
PolygonConnect Polygon_B.Cu--190_ConnectRelief45 [IsNamedPolygon('B.Cu--190') vs (IsThruPin or IsSMTPin) and (PadShape_AllLayers = 'Round')] p503: connectstyle=Relief reliefconductorwidth=0.254 reliefentries=4 polygonreliefangle="45 Angle" airgapwidth=0.254
PolygonConnect Polygon_B.Cu--190_ConnectRelief90 [IsNamedPolygon('B.Cu--190') vs (IsThruPin or IsSMTPin) and (PadShape_AllLayers <> 'Round')] p504: connectstyle=Relief reliefconductorwidth=0.254 reliefentries=4 polygonreliefangle="90 Angle" airgapwidth=0.254
PolygonConnect Polygon_B.Cu--189_ConnectDirect [IsNamedPolygon('B.Cu--189') vs IsVia] p505: connectstyle=Direct reliefconductorwidth=0.254 reliefentries=4 polygonreliefangle="90 Angle" airgapwidth=0.254
PolygonConnect Polygon_B.Cu--189_ConnectRelief45 [IsNamedPolygon('B.Cu--189') vs (IsThruPin or IsSMTPin) and (PadShape_AllLayers = 'Round')] p506: connectstyle=Relief reliefconductorwidth=0.254 reliefentries=4 polygonreliefangle="45 Angle" airgapwidth=0.254
PolygonConnect Polygon_B.Cu--189_ConnectRelief90 [IsNamedPolygon('B.Cu--189') vs (IsThruPin or IsSMTPin) and (PadShape_AllLayers <> 'Round')] p507: connectstyle=Relief reliefconductorwidth=0.254 reliefentries=4 polygonreliefangle="90 Angle" airgapwidth=0.254
PolygonConnect Polygon_B.Cu--188_ConnectDirect [IsNamedPolygon('B.Cu--188') vs IsVia] p508: connectstyle=Direct reliefconductorwidth=0.254 reliefentries=4 polygonreliefangle="90 Angle" airgapwidth=0.254
PolygonConnect Polygon_B.Cu--188_ConnectRelief45 [IsNamedPolygon('B.Cu--188') vs (IsThruPin or IsSMTPin) and (PadShape_AllLayers = 'Round')] p509: connectstyle=Relief reliefconductorwidth=0.254 reliefentries=4 polygonreliefangle="45 Angle" airgapwidth=0.254
PolygonConnect Polygon_B.Cu--188_ConnectRelief90 [IsNamedPolygon('B.Cu--188') vs (IsThruPin or IsSMTPin) and (PadShape_AllLayers <> 'Round')] p510: connectstyle=Relief reliefconductorwidth=0.254 reliefentries=4 polygonreliefangle="90 Angle" airgapwidth=0.254
PolygonConnect Polygon_B.Cu--187_ConnectDirect [IsNamedPolygon('B.Cu--187') vs IsVia] p511: connectstyle=Direct reliefconductorwidth=0.254 reliefentries=4 polygonreliefangle="90 Angle" airgapwidth=0.254
PolygonConnect Polygon_B.Cu--187_ConnectRelief45 [IsNamedPolygon('B.Cu--187') vs (IsThruPin or IsSMTPin) and (PadShape_AllLayers = 'Round')] p512: connectstyle=Relief reliefconductorwidth=0.254 reliefentries=4 polygonreliefangle="45 Angle" airgapwidth=0.254
PolygonConnect Polygon_B.Cu--187_ConnectRelief90 [IsNamedPolygon('B.Cu--187') vs (IsThruPin or IsSMTPin) and (PadShape_AllLayers <> 'Round')] p513: connectstyle=Relief reliefconductorwidth=0.254 reliefentries=4 polygonreliefangle="90 Angle" airgapwidth=0.254
PolygonConnect Polygon_B.Cu--186_ConnectDirect [IsNamedPolygon('B.Cu--186') vs IsVia] p514: connectstyle=Direct reliefconductorwidth=0.254 reliefentries=4 polygonreliefangle="90 Angle" airgapwidth=0.254
PolygonConnect Polygon_B.Cu--186_ConnectRelief45 [IsNamedPolygon('B.Cu--186') vs (IsThruPin or IsSMTPin) and (PadShape_AllLayers = 'Round')] p515: connectstyle=Relief reliefconductorwidth=0.254 reliefentries=4 polygonreliefangle="45 Angle" airgapwidth=0.254
PolygonConnect Polygon_B.Cu--186_ConnectRelief90 [IsNamedPolygon('B.Cu--186') vs (IsThruPin or IsSMTPin) and (PadShape_AllLayers <> 'Round')] p516: connectstyle=Relief reliefconductorwidth=0.254 reliefentries=4 polygonreliefangle="90 Angle" airgapwidth=0.254
PolygonConnect Polygon_B.Cu--185_ConnectDirect [IsNamedPolygon('B.Cu--185') vs IsVia] p517: connectstyle=Direct reliefconductorwidth=0.254 reliefentries=4 polygonreliefangle="90 Angle" airgapwidth=0.254
PolygonConnect Polygon_B.Cu--185_ConnectRelief45 [IsNamedPolygon('B.Cu--185') vs (IsThruPin or IsSMTPin) and (PadShape_AllLayers = 'Round')] p518: connectstyle=Relief reliefconductorwidth=0.254 reliefentries=4 polygonreliefangle="45 Angle" airgapwidth=0.254
PolygonConnect Polygon_B.Cu--185_ConnectRelief90 [IsNamedPolygon('B.Cu--185') vs (IsThruPin or IsSMTPin) and (PadShape_AllLayers <> 'Round')] p519: connectstyle=Relief reliefconductorwidth=0.254 reliefentries=4 polygonreliefangle="90 Angle" airgapwidth=0.254
PolygonConnect Polygon_B.Cu--184_ConnectDirect [IsNamedPolygon('B.Cu--184') vs IsVia] p520: connectstyle=Direct reliefconductorwidth=0.254 reliefentries=4 polygonreliefangle="90 Angle" airgapwidth=0.254
PolygonConnect Polygon_B.Cu--184_ConnectRelief45 [IsNamedPolygon('B.Cu--184') vs (IsThruPin or IsSMTPin) and (PadShape_AllLayers = 'Round')] p521: connectstyle=Relief reliefconductorwidth=0.254 reliefentries=4 polygonreliefangle="45 Angle" airgapwidth=0.254
PolygonConnect Polygon_B.Cu--184_ConnectRelief90 [IsNamedPolygon('B.Cu--184') vs (IsThruPin or IsSMTPin) and (PadShape_AllLayers <> 'Round')] p522: connectstyle=Relief reliefconductorwidth=0.254 reliefentries=4 polygonreliefangle="90 Angle" airgapwidth=0.254
PolygonConnect Polygon_B.Cu--183_ConnectDirect [IsNamedPolygon('B.Cu--183') vs IsVia] p523: connectstyle=Direct reliefconductorwidth=0.254 reliefentries=4 polygonreliefangle="90 Angle" airgapwidth=0.254
PolygonConnect Polygon_B.Cu--183_ConnectRelief45 [IsNamedPolygon('B.Cu--183') vs (IsThruPin or IsSMTPin) and (PadShape_AllLayers = 'Round')] p524: connectstyle=Relief reliefconductorwidth=0.254 reliefentries=4 polygonreliefangle="45 Angle" airgapwidth=0.254
PolygonConnect Polygon_B.Cu--183_ConnectRelief90 [IsNamedPolygon('B.Cu--183') vs (IsThruPin or IsSMTPin) and (PadShape_AllLayers <> 'Round')] p525: connectstyle=Relief reliefconductorwidth=0.254 reliefentries=4 polygonreliefangle="90 Angle" airgapwidth=0.254
PolygonConnect Polygon_B.Cu--182_ConnectDirect [IsNamedPolygon('B.Cu--182') vs IsVia] p526: connectstyle=Direct reliefconductorwidth=0.254 reliefentries=4 polygonreliefangle="90 Angle" airgapwidth=0.254
PolygonConnect Polygon_B.Cu--182_ConnectRelief45 [IsNamedPolygon('B.Cu--182') vs (IsThruPin or IsSMTPin) and (PadShape_AllLayers = 'Round')] p527: connectstyle=Relief reliefconductorwidth=0.254 reliefentries=4 polygonreliefangle="45 Angle" airgapwidth=0.254
PolygonConnect Polygon_B.Cu--182_ConnectRelief90 [IsNamedPolygon('B.Cu--182') vs (IsThruPin or IsSMTPin) and (PadShape_AllLayers <> 'Round')] p528: connectstyle=Relief reliefconductorwidth=0.254 reliefentries=4 polygonreliefangle="90 Angle" airgapwidth=0.254
PolygonConnect Polygon_B.Cu--181_ConnectDirect [IsNamedPolygon('B.Cu--181') vs IsVia] p529: connectstyle=Direct reliefconductorwidth=0.254 reliefentries=4 polygonreliefangle="90 Angle" airgapwidth=0.254
PolygonConnect Polygon_B.Cu--181_ConnectRelief45 [IsNamedPolygon('B.Cu--181') vs (IsThruPin or IsSMTPin) and (PadShape_AllLayers = 'Round')] p530: connectstyle=Relief reliefconductorwidth=0.254 reliefentries=4 polygonreliefangle="45 Angle" airgapwidth=0.254
PolygonConnect Polygon_B.Cu--181_ConnectRelief90 [IsNamedPolygon('B.Cu--181') vs (IsThruPin or IsSMTPin) and (PadShape_AllLayers <> 'Round')] p531: connectstyle=Relief reliefconductorwidth=0.254 reliefentries=4 polygonreliefangle="90 Angle" airgapwidth=0.254
PolygonConnect Polygon_B.Cu--180_ConnectDirect [IsNamedPolygon('B.Cu--180') vs IsVia] p532: connectstyle=Direct reliefconductorwidth=0.254 reliefentries=4 polygonreliefangle="90 Angle" airgapwidth=0.254
PolygonConnect Polygon_B.Cu--180_ConnectRelief45 [IsNamedPolygon('B.Cu--180') vs (IsThruPin or IsSMTPin) and (PadShape_AllLayers = 'Round')] p533: connectstyle=Relief reliefconductorwidth=0.254 reliefentries=4 polygonreliefangle="45 Angle" airgapwidth=0.254
PolygonConnect Polygon_B.Cu--180_ConnectRelief90 [IsNamedPolygon('B.Cu--180') vs (IsThruPin or IsSMTPin) and (PadShape_AllLayers <> 'Round')] p534: connectstyle=Relief reliefconductorwidth=0.254 reliefentries=4 polygonreliefangle="90 Angle" airgapwidth=0.254
PolygonConnect Polygon_B.Cu--179_ConnectDirect [IsNamedPolygon('B.Cu--179') vs IsVia] p535: connectstyle=Direct reliefconductorwidth=0.254 reliefentries=4 polygonreliefangle="90 Angle" airgapwidth=0.254
PolygonConnect Polygon_B.Cu--179_ConnectRelief45 [IsNamedPolygon('B.Cu--179') vs (IsThruPin or IsSMTPin) and (PadShape_AllLayers = 'Round')] p536: connectstyle=Relief reliefconductorwidth=0.254 reliefentries=4 polygonreliefangle="45 Angle" airgapwidth=0.254
PolygonConnect Polygon_B.Cu--179_ConnectRelief90 [IsNamedPolygon('B.Cu--179') vs (IsThruPin or IsSMTPin) and (PadShape_AllLayers <> 'Round')] p537: connectstyle=Relief reliefconductorwidth=0.254 reliefentries=4 polygonreliefangle="90 Angle" airgapwidth=0.254
PolygonConnect Polygon_B.Cu--178_ConnectDirect [IsNamedPolygon('B.Cu--178') vs IsVia] p538: connectstyle=Direct reliefconductorwidth=0.254 reliefentries=4 polygonreliefangle="90 Angle" airgapwidth=0.254
PolygonConnect Polygon_B.Cu--178_ConnectRelief45 [IsNamedPolygon('B.Cu--178') vs (IsThruPin or IsSMTPin) and (PadShape_AllLayers = 'Round')] p539: connectstyle=Relief reliefconductorwidth=0.254 reliefentries=4 polygonreliefangle="45 Angle" airgapwidth=0.254
PolygonConnect Polygon_B.Cu--178_ConnectRelief90 [IsNamedPolygon('B.Cu--178') vs (IsThruPin or IsSMTPin) and (PadShape_AllLayers <> 'Round')] p540: connectstyle=Relief reliefconductorwidth=0.254 reliefentries=4 polygonreliefangle="90 Angle" airgapwidth=0.254
PolygonConnect Polygon_B.Cu--177_ConnectDirect [IsNamedPolygon('B.Cu--177') vs IsVia] p541: connectstyle=Direct reliefconductorwidth=0.254 reliefentries=4 polygonreliefangle="90 Angle" airgapwidth=0.254
PolygonConnect Polygon_B.Cu--177_ConnectRelief45 [IsNamedPolygon('B.Cu--177') vs (IsThruPin or IsSMTPin) and (PadShape_AllLayers = 'Round')] p542: connectstyle=Relief reliefconductorwidth=0.254 reliefentries=4 polygonreliefangle="45 Angle" airgapwidth=0.254
PolygonConnect Polygon_B.Cu--177_ConnectRelief90 [IsNamedPolygon('B.Cu--177') vs (IsThruPin or IsSMTPin) and (PadShape_AllLayers <> 'Round')] p543: connectstyle=Relief reliefconductorwidth=0.254 reliefentries=4 polygonreliefangle="90 Angle" airgapwidth=0.254
PolygonConnect Polygon_B.Cu--176_ConnectDirect [IsNamedPolygon('B.Cu--176') vs IsVia] p544: connectstyle=Direct reliefconductorwidth=0.254 reliefentries=4 polygonreliefangle="90 Angle" airgapwidth=0.254
PolygonConnect Polygon_B.Cu--176_ConnectRelief45 [IsNamedPolygon('B.Cu--176') vs (IsThruPin or IsSMTPin) and (PadShape_AllLayers = 'Round')] p545: connectstyle=Relief reliefconductorwidth=0.254 reliefentries=4 polygonreliefangle="45 Angle" airgapwidth=0.254
PolygonConnect Polygon_B.Cu--176_ConnectRelief90 [IsNamedPolygon('B.Cu--176') vs (IsThruPin or IsSMTPin) and (PadShape_AllLayers <> 'Round')] p546: connectstyle=Relief reliefconductorwidth=0.254 reliefentries=4 polygonreliefangle="90 Angle" airgapwidth=0.254
PolygonConnect Polygon_B.Cu--175_ConnectDirect [IsNamedPolygon('B.Cu--175') vs IsVia] p547: connectstyle=Direct reliefconductorwidth=0.254 reliefentries=4 polygonreliefangle="90 Angle" airgapwidth=0.254
PolygonConnect Polygon_B.Cu--175_ConnectRelief45 [IsNamedPolygon('B.Cu--175') vs (IsThruPin or IsSMTPin) and (PadShape_AllLayers = 'Round')] p548: connectstyle=Relief reliefconductorwidth=0.254 reliefentries=4 polygonreliefangle="45 Angle" airgapwidth=0.254
PolygonConnect Polygon_B.Cu--175_ConnectRelief90 [IsNamedPolygon('B.Cu--175') vs (IsThruPin or IsSMTPin) and (PadShape_AllLayers <> 'Round')] p549: connectstyle=Relief reliefconductorwidth=0.254 reliefentries=4 polygonreliefangle="90 Angle" airgapwidth=0.254
PolygonConnect Polygon_B.Cu--174_ConnectDirect [IsNamedPolygon('B.Cu--174') vs IsVia] p550: connectstyle=Direct reliefconductorwidth=0.254 reliefentries=4 polygonreliefangle="90 Angle" airgapwidth=0.254
PolygonConnect Polygon_B.Cu--174_ConnectRelief45 [IsNamedPolygon('B.Cu--174') vs (IsThruPin or IsSMTPin) and (PadShape_AllLayers = 'Round')] p551: connectstyle=Relief reliefconductorwidth=0.254 reliefentries=4 polygonreliefangle="45 Angle" airgapwidth=0.254
PolygonConnect Polygon_B.Cu--174_ConnectRelief90 [IsNamedPolygon('B.Cu--174') vs (IsThruPin or IsSMTPin) and (PadShape_AllLayers <> 'Round')] p552: connectstyle=Relief reliefconductorwidth=0.254 reliefentries=4 polygonreliefangle="90 Angle" airgapwidth=0.254
PolygonConnect Polygon_B.Cu--173_ConnectDirect [IsNamedPolygon('B.Cu--173') vs IsVia] p553: connectstyle=Direct reliefconductorwidth=0.254 reliefentries=4 polygonreliefangle="90 Angle" airgapwidth=0.254
PolygonConnect Polygon_B.Cu--173_ConnectRelief45 [IsNamedPolygon('B.Cu--173') vs (IsThruPin or IsSMTPin) and (PadShape_AllLayers = 'Round')] p554: connectstyle=Relief reliefconductorwidth=0.254 reliefentries=4 polygonreliefangle="45 Angle" airgapwidth=0.254
PolygonConnect Polygon_B.Cu--173_ConnectRelief90 [IsNamedPolygon('B.Cu--173') vs (IsThruPin or IsSMTPin) and (PadShape_AllLayers <> 'Round')] p555: connectstyle=Relief reliefconductorwidth=0.254 reliefentries=4 polygonreliefangle="90 Angle" airgapwidth=0.254
PolygonConnect Polygon_B.Cu--172_ConnectDirect [IsNamedPolygon('B.Cu--172') vs IsVia] p556: connectstyle=Direct reliefconductorwidth=0.254 reliefentries=4 polygonreliefangle="90 Angle" airgapwidth=0.254
PolygonConnect Polygon_B.Cu--172_ConnectRelief45 [IsNamedPolygon('B.Cu--172') vs (IsThruPin or IsSMTPin) and (PadShape_AllLayers = 'Round')] p557: connectstyle=Relief reliefconductorwidth=0.254 reliefentries=4 polygonreliefangle="45 Angle" airgapwidth=0.254
PolygonConnect Polygon_B.Cu--172_ConnectRelief90 [IsNamedPolygon('B.Cu--172') vs (IsThruPin or IsSMTPin) and (PadShape_AllLayers <> 'Round')] p558: connectstyle=Relief reliefconductorwidth=0.254 reliefentries=4 polygonreliefangle="90 Angle" airgapwidth=0.254
PolygonConnect Polygon_B.Cu--171_ConnectDirect [IsNamedPolygon('B.Cu--171') vs IsVia] p559: connectstyle=Direct reliefconductorwidth=0.254 reliefentries=4 polygonreliefangle="90 Angle" airgapwidth=0.254
PolygonConnect Polygon_B.Cu--171_ConnectRelief45 [IsNamedPolygon('B.Cu--171') vs (IsThruPin or IsSMTPin) and (PadShape_AllLayers = 'Round')] p560: connectstyle=Relief reliefconductorwidth=0.254 reliefentries=4 polygonreliefangle="45 Angle" airgapwidth=0.254
PolygonConnect Polygon_B.Cu--171_ConnectRelief90 [IsNamedPolygon('B.Cu--171') vs (IsThruPin or IsSMTPin) and (PadShape_AllLayers <> 'Round')] p561: connectstyle=Relief reliefconductorwidth=0.254 reliefentries=4 polygonreliefangle="90 Angle" airgapwidth=0.254
PolygonConnect Polygon_B.Cu--170_ConnectDirect [IsNamedPolygon('B.Cu--170') vs IsVia] p562: connectstyle=Direct reliefconductorwidth=0.254 reliefentries=4 polygonreliefangle="90 Angle" airgapwidth=0.254
PolygonConnect Polygon_B.Cu--170_ConnectRelief45 [IsNamedPolygon('B.Cu--170') vs (IsThruPin or IsSMTPin) and (PadShape_AllLayers = 'Round')] p563: connectstyle=Relief reliefconductorwidth=0.254 reliefentries=4 polygonreliefangle="45 Angle" airgapwidth=0.254
PolygonConnect Polygon_B.Cu--170_ConnectRelief90 [IsNamedPolygon('B.Cu--170') vs (IsThruPin or IsSMTPin) and (PadShape_AllLayers <> 'Round')] p564: connectstyle=Relief reliefconductorwidth=0.254 reliefentries=4 polygonreliefangle="90 Angle" airgapwidth=0.254
PolygonConnect Polygon_B.Cu--169_ConnectDirect [IsNamedPolygon('B.Cu--169') vs IsVia] p565: connectstyle=Direct reliefconductorwidth=0.254 reliefentries=4 polygonreliefangle="90 Angle" airgapwidth=0.254
PolygonConnect Polygon_B.Cu--169_ConnectRelief45 [IsNamedPolygon('B.Cu--169') vs (IsThruPin or IsSMTPin) and (PadShape_AllLayers = 'Round')] p566: connectstyle=Relief reliefconductorwidth=0.254 reliefentries=4 polygonreliefangle="45 Angle" airgapwidth=0.254
PolygonConnect Polygon_B.Cu--169_ConnectRelief90 [IsNamedPolygon('B.Cu--169') vs (IsThruPin or IsSMTPin) and (PadShape_AllLayers <> 'Round')] p567: connectstyle=Relief reliefconductorwidth=0.254 reliefentries=4 polygonreliefangle="90 Angle" airgapwidth=0.254
PolygonConnect Polygon_B.Cu--168_ConnectDirect [IsNamedPolygon('B.Cu--168') vs IsVia] p568: connectstyle=Direct reliefconductorwidth=0.254 reliefentries=4 polygonreliefangle="90 Angle" airgapwidth=0.254
PolygonConnect Polygon_B.Cu--168_ConnectRelief45 [IsNamedPolygon('B.Cu--168') vs (IsThruPin or IsSMTPin) and (PadShape_AllLayers = 'Round')] p569: connectstyle=Relief reliefconductorwidth=0.254 reliefentries=4 polygonreliefangle="45 Angle" airgapwidth=0.254
PolygonConnect Polygon_B.Cu--168_ConnectRelief90 [IsNamedPolygon('B.Cu--168') vs (IsThruPin or IsSMTPin) and (PadShape_AllLayers <> 'Round')] p570: connectstyle=Relief reliefconductorwidth=0.254 reliefentries=4 polygonreliefangle="90 Angle" airgapwidth=0.254
PolygonConnect Polygon_B.Cu--167_ConnectDirect [IsNamedPolygon('B.Cu--167') vs IsVia] p571: connectstyle=Direct reliefconductorwidth=0.254 reliefentries=4 polygonreliefangle="90 Angle" airgapwidth=0.254
PolygonConnect Polygon_B.Cu--167_ConnectRelief45 [IsNamedPolygon('B.Cu--167') vs (IsThruPin or IsSMTPin) and (PadShape_AllLayers = 'Round')] p572: connectstyle=Relief reliefconductorwidth=0.254 reliefentries=4 polygonreliefangle="45 Angle" airgapwidth=0.254
PolygonConnect Polygon_B.Cu--167_ConnectRelief90 [IsNamedPolygon('B.Cu--167') vs (IsThruPin or IsSMTPin) and (PadShape_AllLayers <> 'Round')] p573: connectstyle=Relief reliefconductorwidth=0.254 reliefentries=4 polygonreliefangle="90 Angle" airgapwidth=0.254
PolygonConnect Polygon_B.Cu--166_ConnectDirect [IsNamedPolygon('B.Cu--166') vs IsVia] p574: connectstyle=Direct reliefconductorwidth=0.254 reliefentries=4 polygonreliefangle="90 Angle" airgapwidth=0.254
PolygonConnect Polygon_B.Cu--166_ConnectRelief45 [IsNamedPolygon('B.Cu--166') vs (IsThruPin or IsSMTPin) and (PadShape_AllLayers = 'Round')] p575: connectstyle=Relief reliefconductorwidth=0.254 reliefentries=4 polygonreliefangle="45 Angle" airgapwidth=0.254
PolygonConnect Polygon_B.Cu--166_ConnectRelief90 [IsNamedPolygon('B.Cu--166') vs (IsThruPin or IsSMTPin) and (PadShape_AllLayers <> 'Round')] p576: connectstyle=Relief reliefconductorwidth=0.254 reliefentries=4 polygonreliefangle="90 Angle" airgapwidth=0.254
PolygonConnect Polygon_B.Cu--165_ConnectDirect [IsNamedPolygon('B.Cu--165') vs IsVia] p577: connectstyle=Direct reliefconductorwidth=0.254 reliefentries=4 polygonreliefangle="90 Angle" airgapwidth=0.254
PolygonConnect Polygon_B.Cu--165_ConnectRelief45 [IsNamedPolygon('B.Cu--165') vs (IsThruPin or IsSMTPin) and (PadShape_AllLayers = 'Round')] p578: connectstyle=Relief reliefconductorwidth=0.254 reliefentries=4 polygonreliefangle="45 Angle" airgapwidth=0.254
PolygonConnect Polygon_B.Cu--165_ConnectRelief90 [IsNamedPolygon('B.Cu--165') vs (IsThruPin or IsSMTPin) and (PadShape_AllLayers <> 'Round')] p579: connectstyle=Relief reliefconductorwidth=0.254 reliefentries=4 polygonreliefangle="90 Angle" airgapwidth=0.254
PolygonConnect Polygon_B.Cu--164_ConnectDirect [IsNamedPolygon('B.Cu--164') vs IsVia] p580: connectstyle=Direct reliefconductorwidth=0.254 reliefentries=4 polygonreliefangle="90 Angle" airgapwidth=0.254
PolygonConnect Polygon_B.Cu--164_ConnectRelief45 [IsNamedPolygon('B.Cu--164') vs (IsThruPin or IsSMTPin) and (PadShape_AllLayers = 'Round')] p581: connectstyle=Relief reliefconductorwidth=0.254 reliefentries=4 polygonreliefangle="45 Angle" airgapwidth=0.254
PolygonConnect Polygon_B.Cu--164_ConnectRelief90 [IsNamedPolygon('B.Cu--164') vs (IsThruPin or IsSMTPin) and (PadShape_AllLayers <> 'Round')] p582: connectstyle=Relief reliefconductorwidth=0.254 reliefentries=4 polygonreliefangle="90 Angle" airgapwidth=0.254
PolygonConnect Polygon_B.Cu--163_ConnectDirect [IsNamedPolygon('B.Cu--163') vs IsVia] p583: connectstyle=Direct reliefconductorwidth=0.254 reliefentries=4 polygonreliefangle="90 Angle" airgapwidth=0.254
PolygonConnect Polygon_B.Cu--163_ConnectRelief45 [IsNamedPolygon('B.Cu--163') vs (IsThruPin or IsSMTPin) and (PadShape_AllLayers = 'Round')] p584: connectstyle=Relief reliefconductorwidth=0.254 reliefentries=4 polygonreliefangle="45 Angle" airgapwidth=0.254
PolygonConnect Polygon_B.Cu--163_ConnectRelief90 [IsNamedPolygon('B.Cu--163') vs (IsThruPin or IsSMTPin) and (PadShape_AllLayers <> 'Round')] p585: connectstyle=Relief reliefconductorwidth=0.254 reliefentries=4 polygonreliefangle="90 Angle" airgapwidth=0.254
PolygonConnect Polygon_B.Cu--162_ConnectDirect [IsNamedPolygon('B.Cu--162') vs IsVia] p586: connectstyle=Direct reliefconductorwidth=0.254 reliefentries=4 polygonreliefangle="90 Angle" airgapwidth=0.254
PolygonConnect Polygon_B.Cu--162_ConnectRelief45 [IsNamedPolygon('B.Cu--162') vs (IsThruPin or IsSMTPin) and (PadShape_AllLayers = 'Round')] p587: connectstyle=Relief reliefconductorwidth=0.254 reliefentries=4 polygonreliefangle="45 Angle" airgapwidth=0.254
PolygonConnect Polygon_B.Cu--162_ConnectRelief90 [IsNamedPolygon('B.Cu--162') vs (IsThruPin or IsSMTPin) and (PadShape_AllLayers <> 'Round')] p588: connectstyle=Relief reliefconductorwidth=0.254 reliefentries=4 polygonreliefangle="90 Angle" airgapwidth=0.254
PolygonConnect Polygon_B.Cu--161_ConnectDirect [IsNamedPolygon('B.Cu--161') vs IsVia] p589: connectstyle=Direct reliefconductorwidth=0.254 reliefentries=4 polygonreliefangle="90 Angle" airgapwidth=0.254
PolygonConnect Polygon_B.Cu--161_ConnectRelief45 [IsNamedPolygon('B.Cu--161') vs (IsThruPin or IsSMTPin) and (PadShape_AllLayers = 'Round')] p590: connectstyle=Relief reliefconductorwidth=0.254 reliefentries=4 polygonreliefangle="45 Angle" airgapwidth=0.254
PolygonConnect Polygon_B.Cu--161_ConnectRelief90 [IsNamedPolygon('B.Cu--161') vs (IsThruPin or IsSMTPin) and (PadShape_AllLayers <> 'Round')] p591: connectstyle=Relief reliefconductorwidth=0.254 reliefentries=4 polygonreliefangle="90 Angle" airgapwidth=0.254
PolygonConnect Polygon_B.Cu--160_ConnectDirect [IsNamedPolygon('B.Cu--160') vs IsVia] p592: connectstyle=Direct reliefconductorwidth=0.254 reliefentries=4 polygonreliefangle="90 Angle" airgapwidth=0.254
PolygonConnect Polygon_B.Cu--160_ConnectRelief45 [IsNamedPolygon('B.Cu--160') vs (IsThruPin or IsSMTPin) and (PadShape_AllLayers = 'Round')] p593: connectstyle=Relief reliefconductorwidth=0.254 reliefentries=4 polygonreliefangle="45 Angle" airgapwidth=0.254
PolygonConnect Polygon_B.Cu--160_ConnectRelief90 [IsNamedPolygon('B.Cu--160') vs (IsThruPin or IsSMTPin) and (PadShape_AllLayers <> 'Round')] p594: connectstyle=Relief reliefconductorwidth=0.254 reliefentries=4 polygonreliefangle="90 Angle" airgapwidth=0.254
PolygonConnect Polygon_B.Cu--159_ConnectDirect [IsNamedPolygon('B.Cu--159') vs IsVia] p595: connectstyle=Direct reliefconductorwidth=0.254 reliefentries=4 polygonreliefangle="90 Angle" airgapwidth=0.254
PolygonConnect Polygon_B.Cu--159_ConnectRelief45 [IsNamedPolygon('B.Cu--159') vs (IsThruPin or IsSMTPin) and (PadShape_AllLayers = 'Round')] p596: connectstyle=Relief reliefconductorwidth=0.254 reliefentries=4 polygonreliefangle="45 Angle" airgapwidth=0.254
PolygonConnect Polygon_B.Cu--159_ConnectRelief90 [IsNamedPolygon('B.Cu--159') vs (IsThruPin or IsSMTPin) and (PadShape_AllLayers <> 'Round')] p597: connectstyle=Relief reliefconductorwidth=0.254 reliefentries=4 polygonreliefangle="90 Angle" airgapwidth=0.254
PolygonConnect Polygon_B.Cu--158_ConnectDirect [IsNamedPolygon('B.Cu--158') vs IsVia] p598: connectstyle=Direct reliefconductorwidth=0.254 reliefentries=4 polygonreliefangle="90 Angle" airgapwidth=0.254
PolygonConnect Polygon_B.Cu--158_ConnectRelief45 [IsNamedPolygon('B.Cu--158') vs (IsThruPin or IsSMTPin) and (PadShape_AllLayers = 'Round')] p599: connectstyle=Relief reliefconductorwidth=0.254 reliefentries=4 polygonreliefangle="45 Angle" airgapwidth=0.254